# EAGLE board ethernet_dip_v1 (EAGLE 6.5.0)
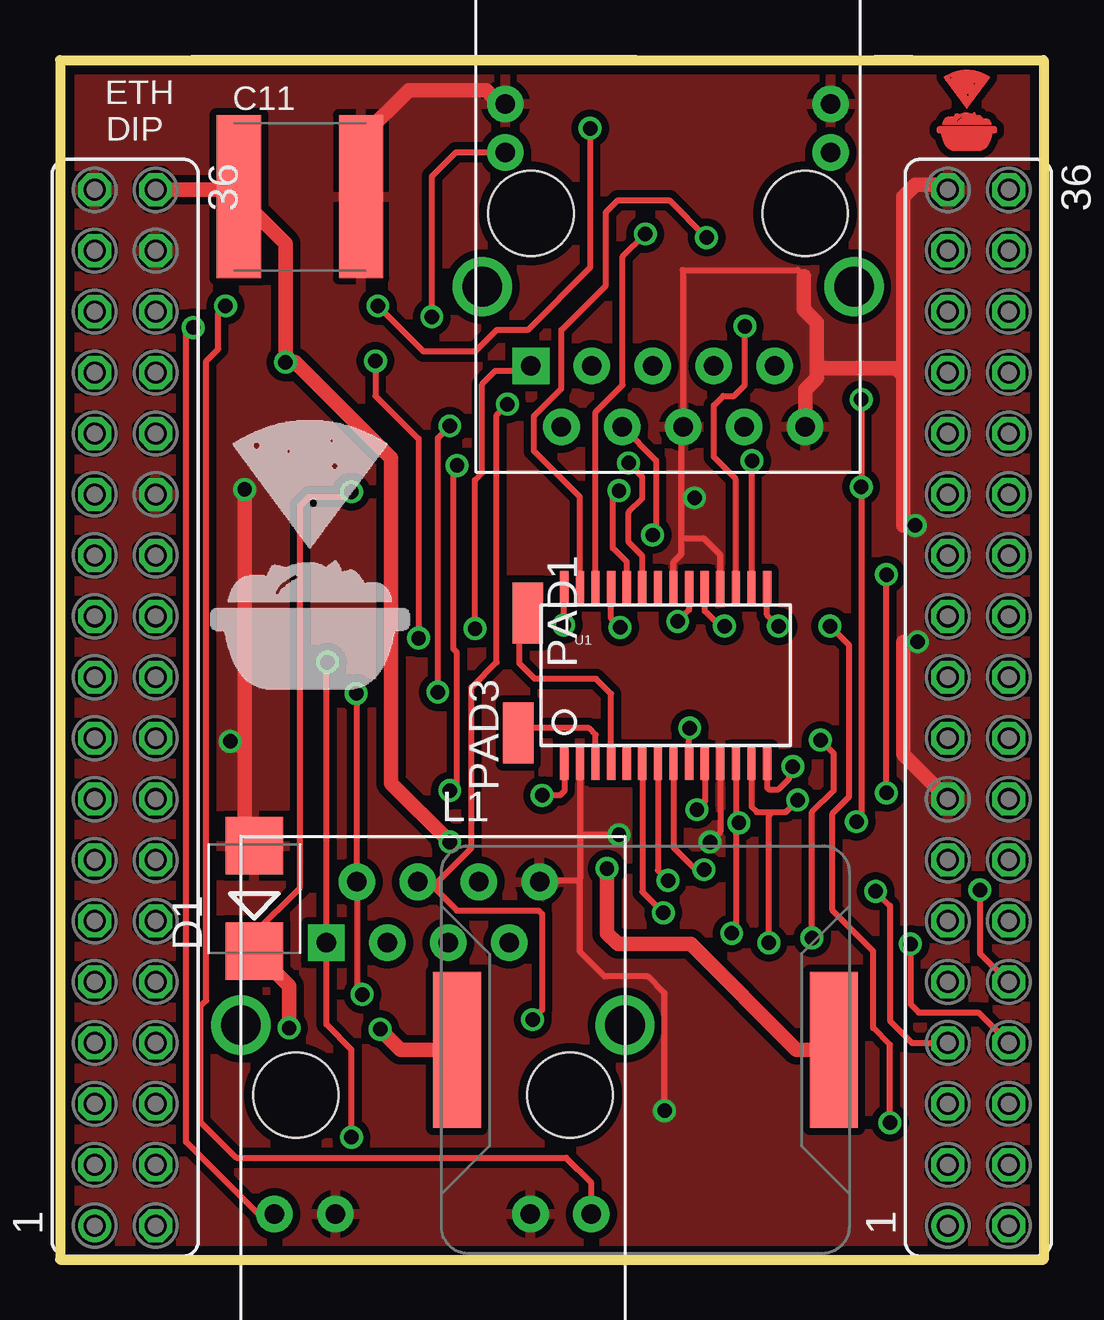
[diagram p0: board, top side]
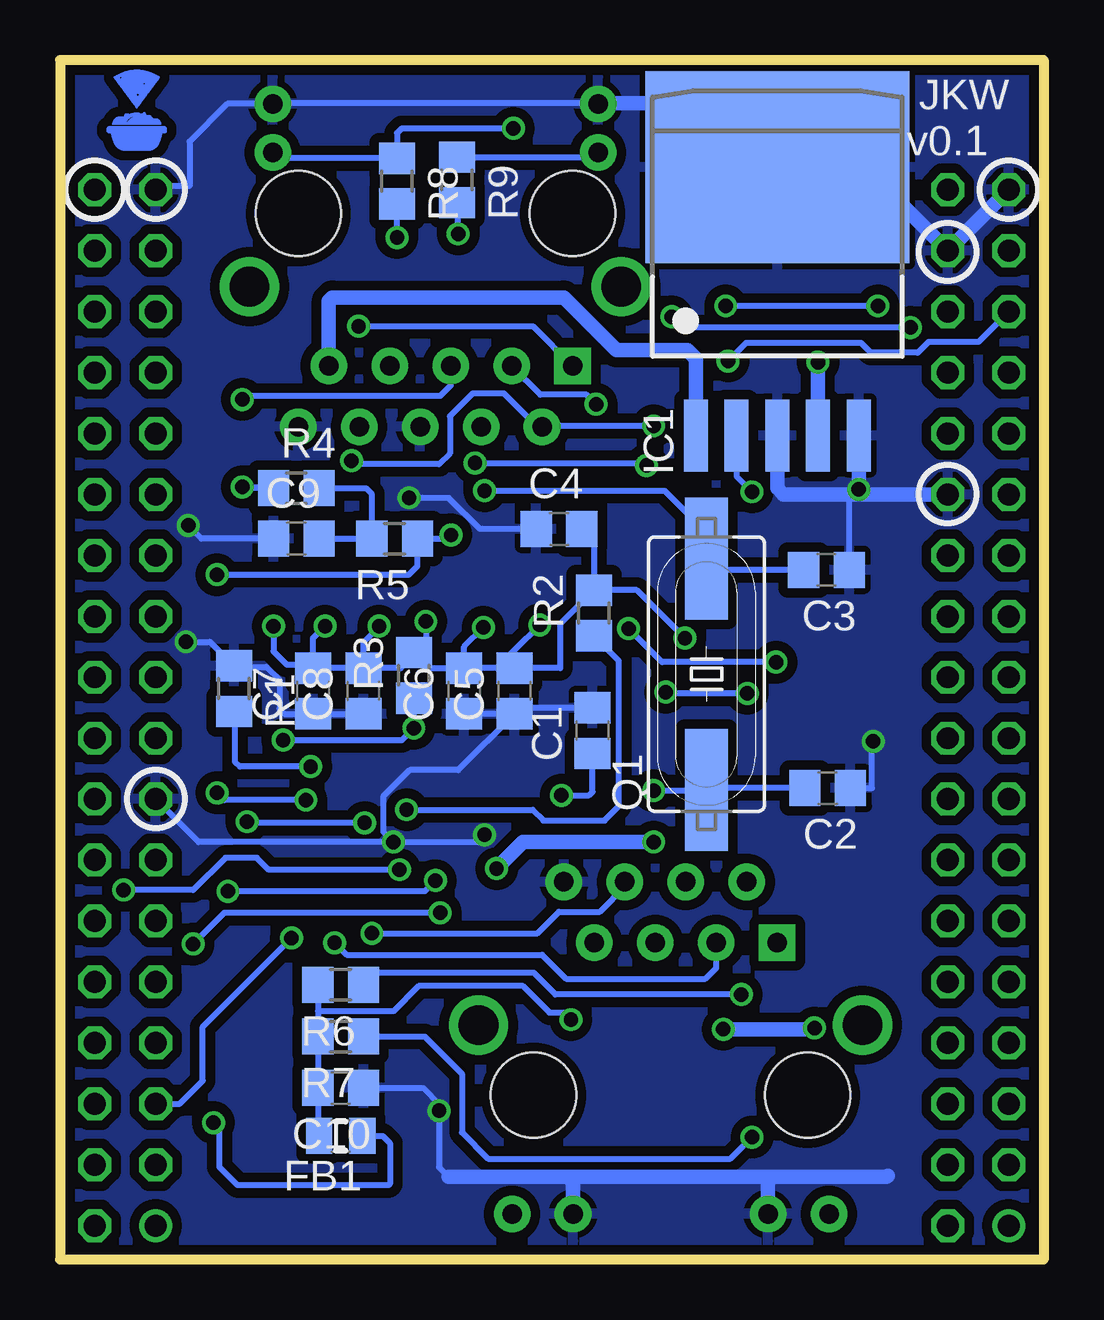
[diagram p1: board, bottom side, seen from below]

Size 41 x 50 mm. Coordinates in mm from the lower left corner, seen from the top.
Outline: 0,50 41,50 41,0 0,0 0,50
Copper layers (1*16): Top 0.0356mm / dielectric 1.5011mm / Bottom 0.0356mm
Design rules "LaenPCBOrder": minimum track width 6mil, minimum drill 13mil, track to track 6mil, track to pad 6mil, pad to pad 6mil, via to via 6mil, smd to smd 6mil, copper to edge 15mil, drill to drill 6mil, minimum pad ring 7mil, minimum via ring 7mil, stop-mask expansion 3mil, vias tented up to drill 0mil, thermal gap 10mil

## Footprints (pad centres in the part's own frame; a part is rotated, then mirrored left to right if it is on the bottom)
C0805 = smd 1.3 x 1.5: 1 -0.95,0; 2 0.95,0
C2225K = smd 1.85 x 6.8: 1 -2.55,0; 2 2.55,0
SMB = smd 2.4 x 2.4: A 2.2,0; C -2.2,0
0805 = smd 1.1 x 1.5: 1 -0.9,0; 2 0.9,0
TO263-5 = smd 1 x 3: 1 -3.4,-8; 2 -1.7,-8; 3 0,-8; 4 1.7,-8; 5 3.4,-8 | smd 11 x 8: TAB 0,3.175
PCC-F179F(S1) = smd 2 x 6.5: 1 -7.85,0; 2 7.85,0
SMD1,27-2,54 = smd 1.27 x 2.54: 1 0,0
SM49 = smd 5.08 x 1.778: 1 -4.826,0; 2 4.826,0
R0805 = smd 1.3 x 1.5: 1 -0.95,0; 2 0.95,0
HR911105A = drill 0.813 pad 1.524: G+ 4.953,-6.604; G- 4.953,-4.064; GND -8.89,4.445; NC -6.35,3.175; P4 -8.89,-0.635; P5 -6.35,0.635; RD+ -6.35,-1.905; RD- -8.89,1.905; TD- -8.89,-3.175; Y+ 4.953,6.604; Y- 4.953,4.064 | drill 1.651 pad 2.159: SHIELD0 -2.921,8.001; SHIELD1 -2.921,-8.001 | drill 0.813 pad 1.524 square: TD+ -6.35,-4.445 | hole 3.556: 0,-5.715; 0,5.715
FE18-2 = drill 0.914: 1 -21.59,1.27 | drill 0.914 octagon: 2 -21.59,-1.27; 3 -19.05,1.27; 4 -19.05,-1.27; 5 -16.51,1.27; 6 -16.51,-1.27; 7 -13.97,1.27; 8 -13.97,-1.27; 9 -11.43,1.27; 10 -11.43,-1.27; 11 -8.89,1.27; 12 -8.89,-1.27; 13 -6.35,1.27; 14 -6.35,-1.27; 15 -3.81,1.27; 16 -3.81,-1.27; 17 -1.27,1.27; 18 -1.27,-1.27; 19 1.27,1.27; 20 1.27,-1.27; 21 3.81,1.27; 22 3.81,-1.27; 23 6.35,1.27; 24 6.35,-1.27; 25 8.89,1.27; 26 8.89,-1.27; 27 11.43,1.27; 28 11.43,-1.27; 29 13.97,1.27; 30 13.97,-1.27; 31 16.51,1.27; 32 16.51,-1.27; 33 19.05,1.27; 34 19.05,-1.27; 35 21.59,1.27; 36 21.59,-1.27
SSOP28DB = smd 0.348 x 1.397: 1 -4.225,-3.656; 2 -3.575,-3.656; 3 -2.925,-3.656; 4 -2.275,-3.656; 5 -1.625,-3.656; 6 -0.975,-3.656; 7 -0.325,-3.656; 8 0.325,-3.656; 9 0.975,-3.656; 10 1.625,-3.656; 11 2.275,-3.656; 12 2.925,-3.656; 13 3.575,-3.656; 14 4.225,-3.656; 15 4.225,3.656; 16 3.575,3.656; 17 2.925,3.656; 18 2.275,3.656; 19 1.625,3.656; 20 0.975,3.656; 21 0.325,3.656; 22 -0.325,3.656; 23 -0.975,3.656; 24 -1.625,3.656; 25 -2.275,3.656; 26 -2.925,3.656; 27 -3.575,3.656; 28 -4.225,3.656
HFJT1 = drill 0.813 pad 1.524 square: 1 5.715,6.35 | drill 0.813 pad 1.524: 2 4.445,8.89; 3 3.175,6.35; 4 1.905,8.89; 5 0.635,6.35; 6 -0.635,8.89; 7 -1.905,6.35; 8 -3.175,8.89; 9 -4.445,6.35; 10 -5.715,8.89; 11 -6.782,-2.54; 12 -6.782,-4.572; 13 6.782,-2.54; 14 6.782,-4.572 | drill 1.651 pad 2.159: SHIELD0 7.747,3.048; SHIELD1 -7.747,3.048 | hole 3.556: -5.715,0; 5.715,0

## Placement (x,y rotation side)
C1  [C0805]  18.8,22.05 90 bottom
C2  [C0805]  9,19.65 180 bottom
C3  [C0805]  9.05,28.75 180 bottom
C4  [C0805]  20.2,30.45 0 bottom
C5  [C0805]  22.05,23.7 90 bottom
C6  [C0805]  24.15,23.7 90 bottom
C7  [C0805]  30.45,23.7 90 bottom
C8  [C0805]  28.35,23.7 90 bottom
C9  [C0805]  31.15,30.05 0 bottom
C10  [C0805]  29.3,7.15 180 bottom
C11  [C2225K]  10,44.3 0 top
D1  ES2D  [SMB]  8.1,15.05 90 top
FB1  [0805]  29.3,5.15 180 bottom
IC1  [TO263-5]  11.1,42.35 0 bottom
L1  [PCC-F179F(S1)]  24.4,8.75 0 top
PAD1  WIREPADSMD1,27-254  [SMD1,27-2,54]  19.5,26.95 180 top
PAD3  WIREPADSMD1,27-254  [SMD1,27-2,54]  19.1,21.95 0 top
Q1  [SM49]  14.05,24.4 90 bottom
R1  2K  [R0805]  33.75,23.8 270 bottom
R2  [R0805]  18.75,26.95 90 bottom
R3  [R0805]  26.25,24.35 90 bottom
R4  [R0805]  31.15,32.15 0 bottom
R5  [R0805]  27.05,30.05 180 bottom
R6  [R0805]  29.3,11.45 180 bottom
R7  [R0805]  29.3,9.3 180 bottom
R8  [R0805]  26.95,44.95 270 bottom
R9  [R0805]  24.45,45 270 bottom
RJ1  HR911105A  [HR911105A]  15.55,6.85 270 top
SV2  [FE18-2]  2.72,23 90 top
SV3  [FE18-2]  38.28,23 90 top
U1  [SSOP28DB]  25.25,24.35 0 top
U$1  HFJT1  [HFJT1]  25.35,43.6 180 top
U$2  LOGO_3X3_COPPER  [LOGO_3X3_COPPER]  37.8,47.9 0 top
U$4  LOGO_3X3_COPPER  [LOGO_3X3_COPPER]  37.8,47.9 0 bottom
U$5  LOGO_10X10_SILK  [LOGO_10X10_SILK]  6.25,23.75 0 top

## Library data of the parts
C1-C10 R1-R9 = rcl
C11 = adafruit
D1 = diode
FB1 L1 = m-pad-2.1
IC1 = AWJLEagleLib
PAD1 PAD3 = wirepad
Q1 = adafruit; OC_FARNELL: unknown; OC_NEWARK: unknown
RJ1 = CONNECTER
SV2 SV3 = con-lsta; OC_FARNELL: unknown; OC_NEWARK: unknown
U1 = SparkFun-DigitalIC
U$1 = CONNECTER; NR: HFJT1-RP48-L12RL
U$2 U$4 U$5 = logo

## Nets
_1V8: SV2.29
_3V3: SV3.27
_5V: SV2.33
ADC: SV3.25
AP: SV3.14
AP2: SV3.13
BAT: SV2.30
CHIP_5V: SV3.36
CHR_IN: C11.1 IC1.4 L1.2 SV2.36
CSICK: SV3.10 U1.8
CSIHSYNC: SV3.7 U1.7
CSIPCK: SV3.9
CSVSYNC: SV3.8 U1.6
CT: C10.2 FB1.2 R6.2 R7.2 RJ1.P4 U$1.3
D0: R3.1 SV3.5 U1.9
D1: SV3.6
D2: SV3.3
D3: SV3.4
D4: SV3.1
D5: SV3.2
FEL: SV3.29
GND: C1.2 C2.1 C3.1 C4.1 C5.1 C6.1 C7.1 C8.1 C9.1 C10.1 C11.2 D1.A IC1.3 IC1.5 IC1.TAB R1.1 RJ1.G- RJ1.GND RJ1.Y- SV2.26 SV2.34 SV2.35 SV3.15 SV3.35 U1.2 U1.11 U1.18 U1.21 U$1.6 U$1.10 U$1.12 U$1.14
HPCOM: SV3.32
HPL: SV3.34
HPR: SV3.30
INT0: SV3.20
INT1: SV3.18
LD2: SV2.19
LD3: SV2.20
LD4: SV2.17
LD5: SV2.18
LD6: SV2.15
LD7: SV2.16
LD8: SV2.13
LD9: SV2.14
LD10: SV2.11
LD11: SV2.12
LD12: SV2.9
LD13: SV2.10
LD14: SV2.7
LD15: SV2.8
LD16: SV2.5
LD17: SV2.6
LD18: SV2.3
LD19: SV2.4
LD20: SV2.1
LD21: SV2.2
MICIN: SV3.26
MICM: SV3.28
N$1: C1.1 U1.1
N$2: R2.1 U1.10
N$3: R1.2 U1.14
N$4: D1.C IC1.2 L1.1
N$6: C3.2 Q1.2 U1.24
N$7: C2.2 Q1.1 U1.23
N$10: R8.1 RJ1.Y+ U$1.11
N$11: R9.1 RJ1.G+ U$1.13
N$12: PAD1.1 U1.4
N$13: PAD3.1 U1.3
N$14: C9.2 R4.2 R5.2
N$15: R8.2 U1.27
N$16: R9.2 U1.26
NC1: U$1.7
NC2: U$1.8
P0: SV3.23
P1: SV3.24
P2: SV3.21
P3: SV3.22
P4: SV3.19
P6: SV3.17
PW+: IC1.1 U$1.9
PWRONN: SV2.28
RD+: R5.1 RJ1.RD+ U1.13 U$1.4
RD-: R4.1 RJ1.RD- U1.12 U$1.5
RX: SV3.31
SCK: SV2.25
SCL2: SV3.12
SDA: SV2.27
SDA2: SV3.11
T5: SV2.32
TD+: R7.1 RJ1.TD+ U1.17 U$1.1
TD-: R6.1 RJ1.TD- U1.16 U$1.2
TX: SV3.33
UNCONNECTED_GND: SV3.16
VDD: C4.2 C5.2 C6.2 C7.2 C8.2 FB1.1 R2.2 R3.2 SV2.31 U1.15 U1.19 U1.20 U1.25 U1.28
X1: SV2.23
X2: SV2.24
Y1: SV2.21
Y2: SV2.22

## Tracks (layer width: path | path; a pad name or v marks a point on that pad's centre or on a via)
CHR_IN  (via drill 0.6)
  Top 0.61: SV2.36 7.16,44.59 C11.1 9.4,42.35 v9.4,37.4 9.8,37.4 13.8,33.4 13.8,19.85 v16.25,17.4 | v22.8,16.3 22.8,13.6 23.25,13.15 26.3,13.15 30.7,8.75 L1.2
  Bottom 0.61: IC1.4 v9.4,37.4 | v22.8,16.3 21.7,17.4 v16.25,17.4
CSICK  (via drill 0.6)
  Top 0.254: U1.8 25.57,17.18 26.5,16.25 v26.85,16.25 | v38.35,15.4 38.35,12.77 SV3.10
  Bottom 0.254: v38.35,15.4 35.45,15.4 34.1,16.75 32.8,16.75 32.3,16.25 v26.85,16.25
CSIHSYNC  (via drill 0.6)
  Top 0.254: U1.7 24.93,16.23 v25.35,15.8 | v34,15.35 34.6,14.75 34.6,9.95 35.52,9.03 SV3.7
  Bottom 0.254: v25.35,15.8 25.8,15.35 v34,15.35
CSVSYNC  (via drill 0.6)
  Top 0.254: U1.6 24.27,15.32 v25.15,14.45 | v35.45,13.15 35.45,10.65 35.8,10.3 38.28,10.3 SV3.8
  Bottom 0.254: v25.15,14.45 34.15,14.45 v35.45,13.15
CT  (via drill 0.6)
  Top 0.254: RJ1.P4 15.36,15.74 15.78,15.32 | 15.78,15.32 16.55,14.55 19.95,14.55 20.1,14.4 20.1,10.4 v19.7,10 | 15.78,15.32 15.78,15.78 17.15,17.15 17.15,23.85 18.2,24.9 18.2,35.2 v18.65,35.65
  Bottom 0.254: R6.2 30.25,10.35 | 30.25,10.35 R7.2 C10.2 30.25,5.2 FB1.2 | 30.25,10.35 27.1,10.35 26.05,11.4 21.7,11.4 20.6,10.3 20,10.3 v19.7,10 | U$1.3 20.98,36.05 19.05,36.05 v18.65,35.65
D0  (via drill 0.6)
  Top 0.254: U1.9 26.23,22.12 v26.25,22.15 | v31.35,13.4 31.35,18.65 32.25,19.55 32.25,21.1 v31.7,21.65
  Bottom 0.254: R3.1 v26.25,22.15 26.75,21.65 v31.7,21.65 | SV3.5 36.01,6.49 35.05,7.45 35.05,9.7 v31.35,13.4
GND  (via drill 0.6)
  Top 0.254: U1.21 25.57,29.07 25.9,29.4 25.9,30.05 | 25.9,30.05 25.9,31.75 | 25.9,31.75 25.9,34.62 U$1.6 25.98,41.22 25.95,41.25 30.75,41.25 31,41 | U1.18 27.52,29.38 26.85,30.05 25.9,30.05 | U1.2 21.68,17.7 | 21.68,17.7 21.68,15.88 | 21.68,15.88 21.6,15.8 20.05,15.8 | U1.11 27.52,17.82 v27.1,17.4 | v35.75,25.75 35.15,25.75 | v35.65,30.6 35.15,30.6 | C11.2 12.55,46.7 12.45,46.8 | v23.3,17.7 21.68,17.7 | v26.45,31.75 25.9,31.75 | 7.7,19.8 7.7,21 v7.1,21.6 | v25.2,6.2 25.2,11.1 24.5,11.8 22.7,11.8 21.68,12.82 21.68,15.88
  Top 0.61: U$1.10 31.07,36.27 31.55,36.75 31.55,37.15 | 31.55,37.15 31.55,39.05 31,39.6 31,41 | SV3.15 35.15,21.05 35.15,25.75 | 35.15,30.6 35.15,36.85 | 35.15,36.85 34.85,37.15 31.55,37.15 | 12.45,46.8 12.6,46.8 14.55,48.75 17.75,48.75 18.3,48.2 18.55,48.2 | v7.7,32.1 7.7,19.8 7.7,17.65 D1.A | 35.15,36.85 35.15,44.3 35.65,44.8 36.72,44.8 36.97,44.55
  Bottom 0.254: C1.2 21.8,23 C5.1 | C5.1 C6.1 | C8.1 C7.1 31.65,22.75 31.85,22.95 31.85,24.15 32.4,24.7 33.7,24.7 R1.1 34.75,25.75 v35.75,25.75 | C10.1 25.85,7.15 25.2,6.5 v25.2,6.2 25.2,3.85 24.8,3.45 | C9.1 35.1,30.05 v35.65,30.6 | 15,48.15 15.1,48.25 15.2,48.25 15.28,48.17 U$1.14 18.77,48.17 18.8,48.2 32.1,48.2 U$1.12 34.03,48.17 35.6,46.6 35.6,44.75 36.85,44.75 SV3.35 | v27.1,17.4 35.22,17.4 SV3.15 | C3.1 8.1,31.7 v7.7,32.1 | C2.1 7.15,19.65 7.15,21.55 v7.1,21.6 | v27.1,17.4 23.6,17.4 v23.3,17.7 | C4.1 23.5,30.45 24.8,31.75 v26.45,31.75 | C5.1 24.4,20.4 26.43,20.4 27.52,19.3 27.52,17.82 v27.1,17.4
  Bottom 0.61: 24.8,3.45 19.85,3.45 | 19.85,3.45 11.3,3.45 | 11.3,3.45 6.55,3.45 6.5,3.5 | RJ1.Y- 19.61,3.21 19.85,3.45 | RJ1.G- 11.49,3.26 11.3,3.45 | 15,48.15 14.8,48.35 14.15,48.35 14.3,48.2 18.55,48.2 | SV2.35 SV2.34 7.62,45.67 IC1.TAB | IC1.5 v7.7,32.1 7.49,31.89 | SV2.26 7.49,31.89 | IC1.3 11.1,32.15 10.84,31.89 7.49,31.89
  pour Top (isolate 0.305, rank 2): -0.07,0.25 40.88,0.25 41.01,10.57 41.01,50.01 0,50.01 0,10.47
  pour Bottom (isolate 0.406): 0,50 41.05,50 41.05,0.25 0.02,0.25 0.02,49.92
N$1  (via drill 0.6)
  Top 0.254: U1.1 21.02,19.52 20.85,19.35 v20.1,19.35
  Bottom 0.254: v20.1,19.35 18.95,19.35 18.8,19.5 C1.1
N$2  (via drill 0.6)
  Top 0.254: U1.10 26.88,19.07 v26.55,18.75
  Bottom 0.254: 18.75,25.65 R2.1 17.7,24.95 17.7,18.9 18.3,18.3 20.85,18.3 21.3,18.75 v26.55,18.75
N$3  (via drill 0.6)
  Top 0.254: U1.14 29.48,19.68 29.55,19.6 29.95,19.6 30.4,20.05 30.4,20.4 v30.55,20.55
  Bottom 0.254: 33.4,22.85 R1.2 33.7,22.8 33.7,20.75 33.5,20.55 v30.55,20.55
N$4  (via drill 0.6)
  Top 0.254: D1.C 8.1,13.6 10,15.5 10,31.4 10.4,31.8 11.95,31.8 v12.15,32
  Top 0.61: L1.1 14.2,8.75 v13.35,9.6 | v9.55,9.65 9.55,11.4 D1.C
  Bottom 0.254: IC1.2 12.8,32.65 v12.15,32
  Bottom 0.61: v13.35,9.6 9.6,9.6 v9.55,9.65
N$6  (via drill 0.6)
  Top 0.254: U1.24 23.62,29.07 23.05,29.65 23.05,31.8 v23.3,32.05
  Bottom 0.254: v23.3,32.05 15.8,32.05 14.05,30.3 Q1.2 13.57,28.75 C3.2
N$7  (via drill 0.6)
  Top 0.254: v23.7,33.2 24.27,32.62 24.27,31.73 23.7,31.15 23.7,29.9 24.27,29.32 U1.23 | v16.25,19.55 16.55,19.85 16.55,25.3 16.4,25.45 16.4,32.95 v16.55,33.1
  Bottom 0.254: C2.2 13.97,19.65 Q1.1 14.07,19.55 v16.25,19.55 | v23.7,33.2 16.65,33.2 v16.55,33.1
N$10  (via drill 0.6)
  Top 0.254: RJ1.Y+ 22.15,3.2 21.1,4.25 7.35,4.25 5.85,5.75 5.85,10.55 6.1,10.8 6.1,37.45 6.6,37.95 6.6,39.45 v6.9,39.75 | v22.1,47.15 22.1,41.35 19.5,38.75 18.2,38.75 17.3,37.85 15.15,37.85 v13.25,39.75
  Bottom 0.254: U$1.11 31.89,45.9 R8.1 26.95,46.95 26.75,47.15 v22.1,47.15 | v6.9,39.75 v13.25,39.75
N$11  (via drill 0.6)
  Top 0.254: RJ1.G+ 8.25,1.9 5.25,4.9 5.25,38.55 v5.55,38.85 | v15.5,39.3 15.5,45.15 16.5,46.15 18.56,46.15 U$1.13
  Bottom 0.254: R9.1 18.76,45.95 U$1.13 | v5.55,38.85 15.05,38.85 v15.5,39.3
N$12
  Top 0.254: U1.4 22.98,23.57 22.35,24.2 19.8,24.2 19.15,24.85 19.15,26.95 PAD1.1
N$13
  Top 0.254: U1.3 22.32,21.88 22.05,22.15 19.3,22.15 PAD3.1
N$14
  Bottom 0.254: R4.2 28.25,32.15 28,31.9 R5.2 C9.2
N$15  (via drill 0.6)
  Top 0.254: U1.27 21.68,31.77 19.75,33.7 19.75,35.15 20.9,36.3 20.9,38.75 22.75,40.6 22.75,43.65 23.25,44.15 25.4,44.15 v26.95,42.6
  Bottom 0.254: v26.95,42.6 R8.2
N$16  (via drill 0.6)
  Top 0.254: U1.26 22.32,35.33 23.45,36.45 23.45,41.8 v24.4,42.75
  Bottom 0.254: v24.4,42.75 24.4,44 R9.2
PW+
  Bottom 0.61: U$1.9 29.8,39.95 29.65,40.1 20,40.1 17.8,37.9 14.85,37.9 14.5,37.55 IC1.1
RD+  (via drill 0.6)
  Top 0.254: U$1.4 24.85,33.3 24.85,30.35 v24.7,30.2 | U1.13 28.82,18.88 29.05,18.65 29.7,18.65 | 29.7,18.65 30.25,18.65 v30.75,19.15 | v34.45,19.45 v34.45,28.55 | v29.55,13.2 29.55,18.5 29.7,18.65
  Bottom 0.254: v29.55,13.2 29.05,12.7 20.9,12.7 19.9,11.7 14.1,11.7 13.64,12.15 RJ1.RD+ | v30.75,19.15 34.15,19.15 v34.45,19.45 | v34.45,28.55 26.45,28.55 26.1,28.9 R5.1 24.85,30.05 v24.7,30.2
RD-  (via drill 0.6)
  Top 0.254: v33.4,35.85 v33.4,32.2 33.4,18.45 v33.2,18.25 | U1.12 28.18,18.32 | 28.18,18.32 v28.3,18.2 | 28.18,18.32 28.18,13.78 v28,13.6
  Bottom 0.254: U$1.5 24.71,36.44 25.15,36 33.25,36 v33.4,35.85 | v28.3,18.2 33.15,18.2 v33.2,18.25 | v28,13.6 21.1,13.6 20.2,14.5 18.5,14.5 17.45,15.54 RJ1.RD- | v33.4,32.2 32.15,32.2 R4.1 33.35,32.15 v33.4,32.2
TD+  (via drill 0.6)
  Top 0.254: U1.17 28.18,32.52 27.25,33.45 27.25,35.6 27.65,36 28.1,36 28.55,36.45 v28.55,38.9 | v12.15,5.1 12.15,8.75 11.11,9.79 RJ1.TD+ 11.11,24.86 v11.15,24.9 | U$1.1 19.43,37.05 18.15,37.05 17.6,36.5 17.6,32.8 17.3,32.5 v17.3,26.3
  Bottom 0.254: v28.55,38.9 21.29,38.9 U$1.1 | R7.1 25.8,9.3 24.25,7.75 24.25,5.3 23.15,4.2 13.05,4.2 v12.15,5.1 12.4,4.85 | v11.15,24.9 15.9,24.9 v17.3,26.3
TD-  (via drill 0.6)
  Top 0.254: v12.6,11.05 12.38,11.28 RJ1.TD- 12.38,23.57 v12.35,23.6 | v15.75,23.65 15.75,34.25 v16.25,34.75 | v28.85,33.3 28.82,33.27 U1.16
  Bottom 0.254: v12.6,11.05 20.35,11.05 21.25,11.95 27.85,11.95 R6.1 | v12.35,23.6 15.7,23.6 v15.75,23.65 | v16.25,34.75 20.86,34.75 U$1.2 21.11,34.71 22.5,36.1 23.8,36.1 24.75,35.15 24.75,33.6 25.2,33.15 28.7,33.15 v28.85,33.3
VDD  (via drill 0.6)
  Top 0.254: v21,26.45 21,27.98 U1.28 | v23.35,26.35 22.98,26.73 U1.25 | v27.7,26.4 27.5,26.4 26.88,27.02 U1.19 | v29.95,26.4 29.48,26.88 U1.15 | v34.6,5.7 34.6,8.95 33.9,9.65 33.9,12.85 32.2,14.55 32.2,18.6 32.9,19.3 32.9,25.6 v32.1,26.4 32.2,26.3 | v13.15,37.45 13.15,36 14.95,34.2 v14.95,25.9 | U1.20 26.23,27.07 v25.75,26.6
  Bottom 0.254: 22.05,25.4 C5.2 20.15,24.65 20.15,26.5 R2.2 | 22.05,25.4 v21,26.45 | C6.2 24.15,25.55 v23.35,26.35 | C8.2 28.35,25.75 v27.7,26.4 | C7.2 30.45,25.9 v29.95,26.4 | C6.2 24.15,24.6 24.2,24.65 | C8.2 C7.2 | FB1.1 27.55,5.15 27.25,4.85 27.25,3.15 27.3,3.1 33.6,3.1 34.35,3.85 34.35,5.45 v34.6,5.7 | v32.1,26.4 32.1,25.35 31.55,24.8 30.6,24.8 C7.2 | C4.2 18.75,29.95 R2.2 | SV2.31 2.71,38.25 4.8,38.25 5.25,37.8 7.2,37.8 7.6,38.2 12.4,38.2 v13.15,37.45 | v14.95,25.9 16.95,27.9 R2.2 | 22.05,25.4 22.8,24.65 C6.2 | v25.75,26.6 25.75,25.7 | 25.75,25.7 R3.2 26.8,24.65 C8.2 | 25.75,25.7 25.75,24.65 C6.2

## Text on the board
bPlace: JKW / v0.1
tNames: ETH / DIP